# EAGLE board PCB PCB (EAGLE 9.7.0)
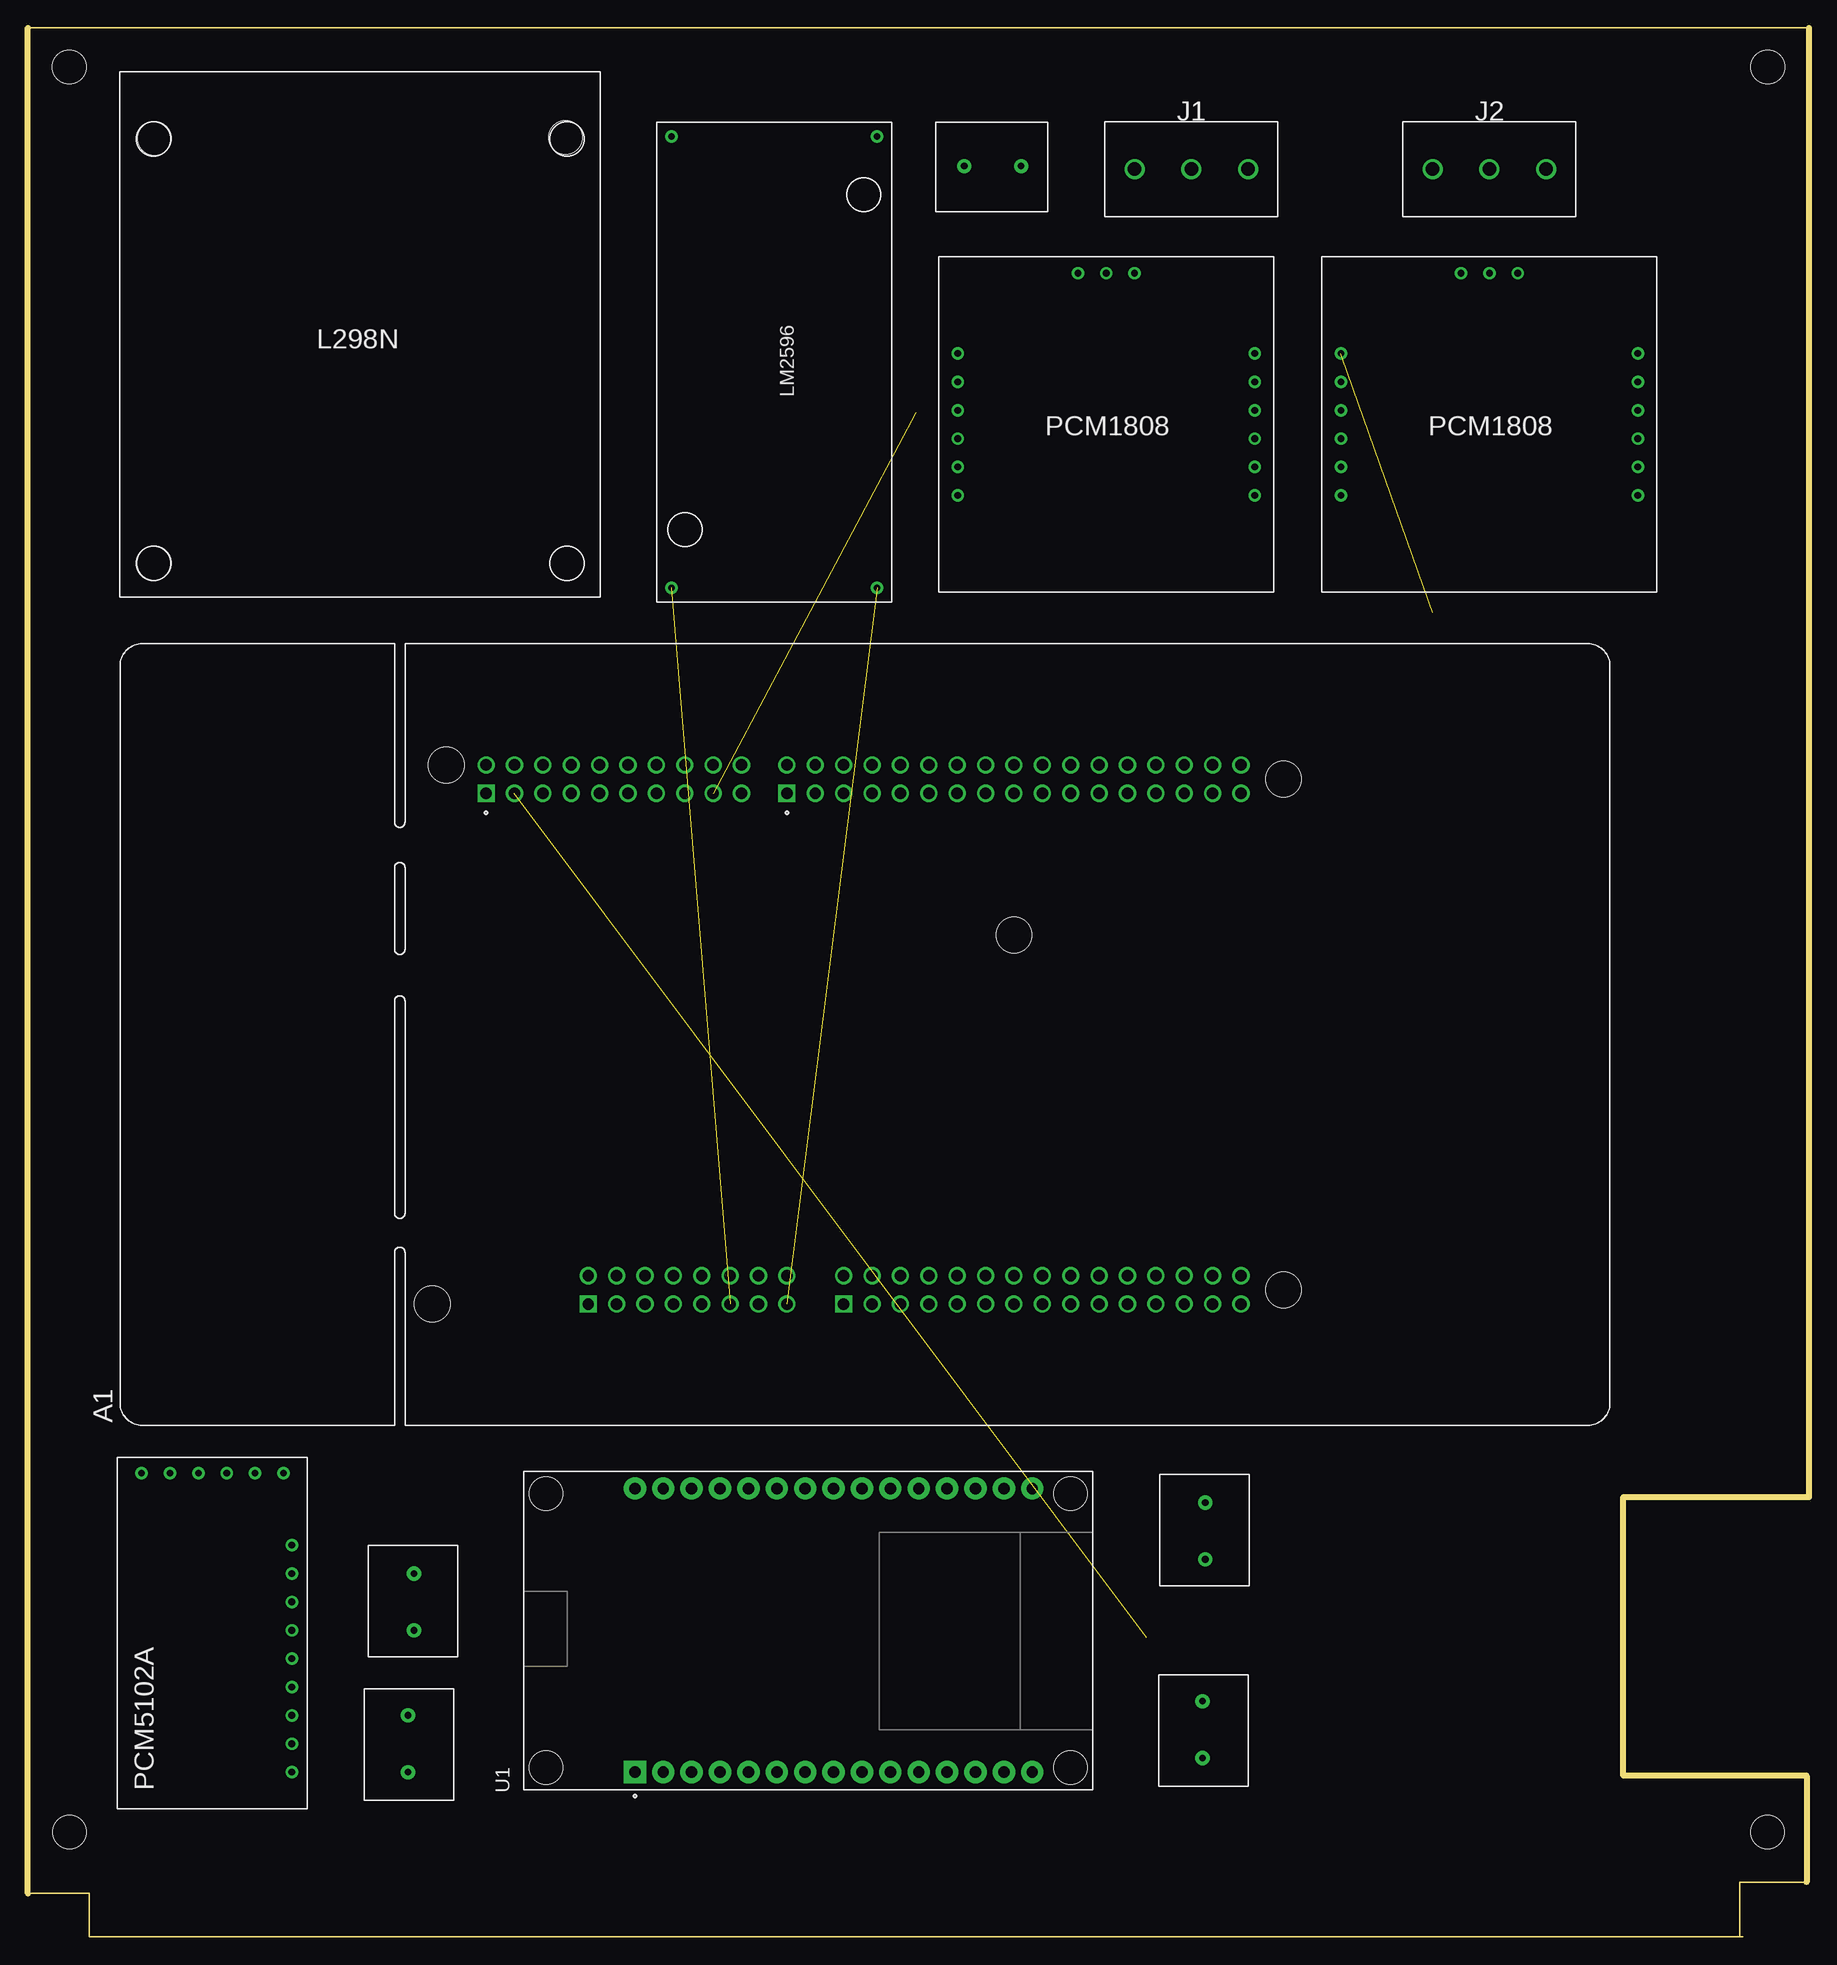
[diagram p0: board, top side]
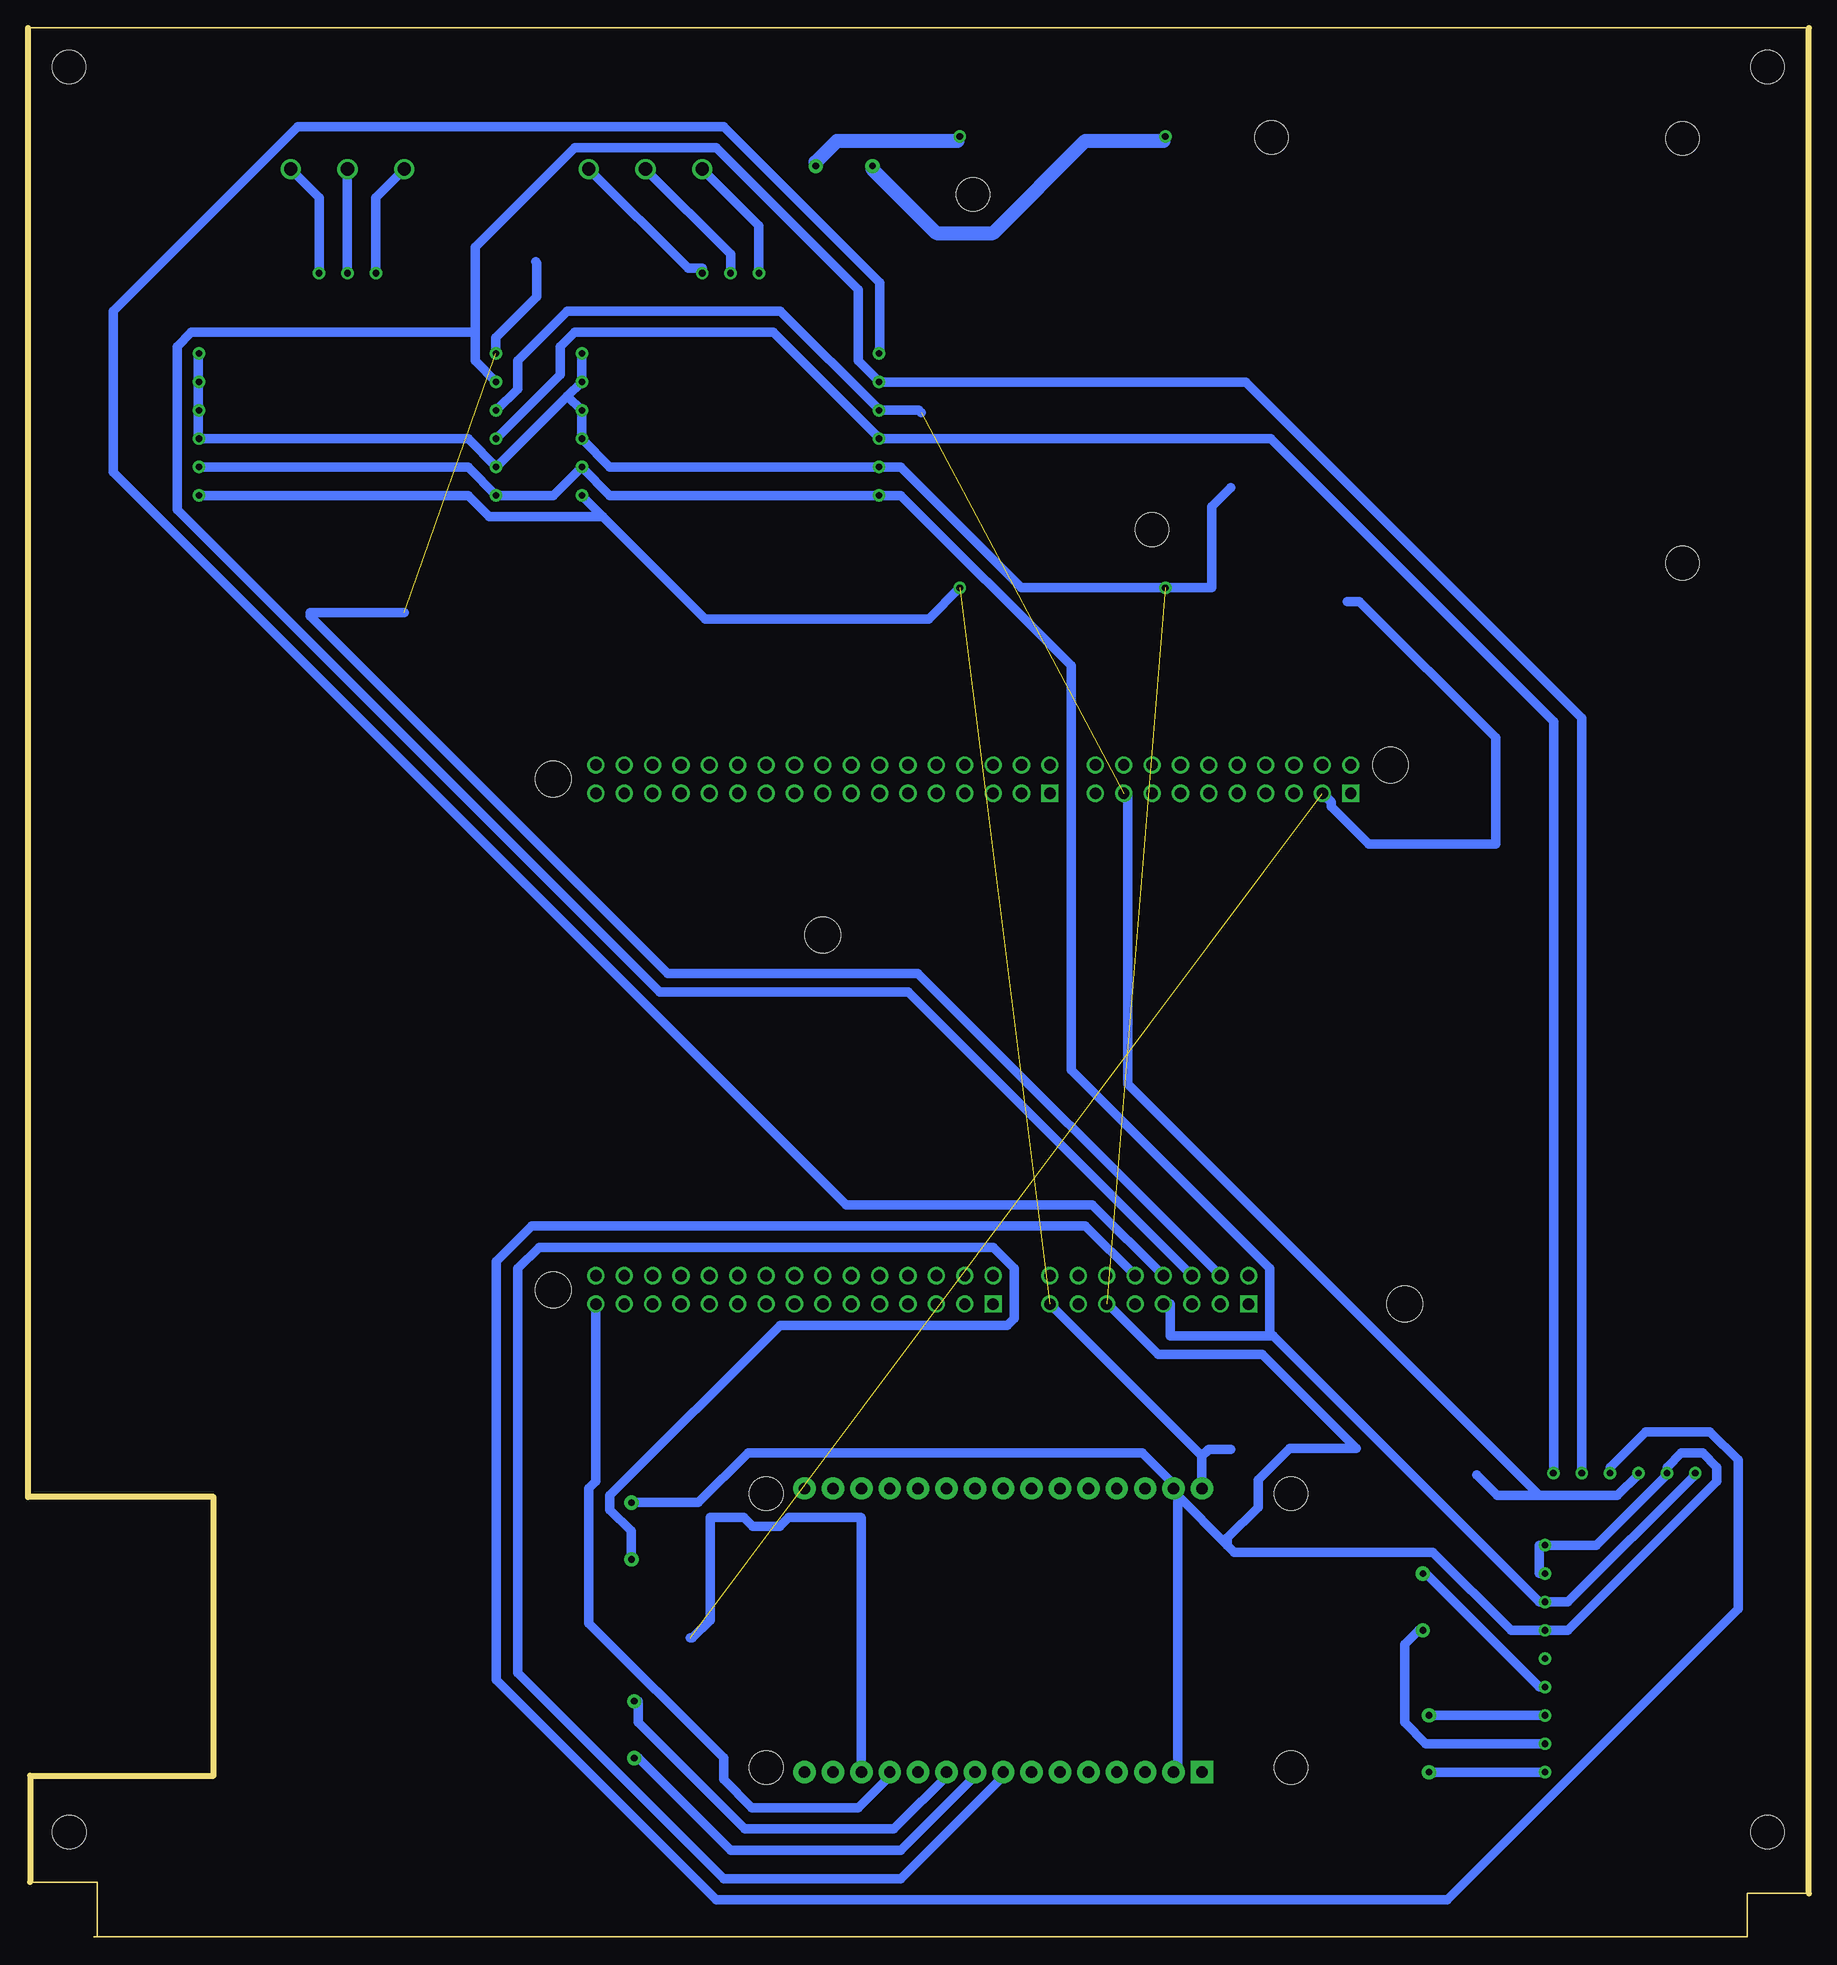
[diagram p1: board, bottom side, seen from below]

Size 159.4 x 170.9 mm. Coordinates in mm from the lower left corner, seen from the top.
Outline: 153.2,0 153.2,4.9 159.2,4.9 159.2,14.45 142.79,14.45 142.79,39.39 159.4,39.39 159.4,170.9 0,170.9 0,3.9 5.5,3.9 5.5,0 153.2,0
Outline: 153.2,0 153.5,0
Copper layers (1*16): Top / Bottom
Stack-up Default Layer Stack: Top User Defined 0.035mm / Dielectric-1 User Defined 1.5mm / Bottom User Defined 0.035mm
Design rules: minimum copper width 33mil, minimum drill size 0.35mm, copper clearance wire_polygon to wire_polygon 33mil, copper clearance wire_polygon to pad_smd 22mil, copper clearance wire_polygon to via 22mil, copper clearance pad_smd to pad_smd 22mil, copper clearance pad_smd to via 22mil, copper clearance via to via 22mil, copper clearance smd to pad (same net) 22mil, copper clearance smd to via (same net) 22mil, copper clearance smd to smd (same net) 22mil, dimension clearance 40mil, via restrict clearance 0mil, restrict clearance 0mil, drill distance 6mil, keepout clearance 0mil
Holes 3 mm at 3.7,167.4 11.32,161 48.11,161.09 11.31,122.99 58.81,125.99 74.81,155.99 3.71,9.39 155.71,9.39 155.72,167.4

## Footprints (pad centres in the part's own frame; a part is rotated, then mirrored left to right if it is on the bottom)
ST_NUCLEO-F767ZI = drill 1.02: 3.3 -24.13,17.15; 5 -24.13,14.61; A1 -24.13,-0.63; A2 -24.13,-3.17; A3 -24.13,-5.71; A4 -24.13,-8.25; A5 -24.13,-10.79; AGND 21.59,4.45; AVDD1 24.13,28.834; D65 -24.13,-33.65; D66 -24.13,-31.11; D67 -24.13,-28.57; D68 -24.13,-23.49; D69 -24.13,-20.95; D70 -24.13,-18.41; D71 -24.13,-15.87; D72 -24.13,-13.33; GND -24.13,12.07; GND1 -24.13,9.53; GND2 -24.13,-26.03; GND3 -21.59,-10.79; GND4 21.59,1.91; GND5 21.59,-13.33; GND6 21.59,-26.03; GND7 24.13,26.294; GND8 24.13,-18.41; IOREF -24.13,22.23; PA0 21.59,-28.57; PA2 21.59,-5.71; PA4 21.59,13.594; PA5 24.13,23.754; PA6 24.13,21.214; PA7 24.13,18.674; PA15 21.59,23.754; PB0 21.59,-31.11; PB1 21.59,-0.63; PB2 21.59,-10.79; PB3 21.59,16.134; PB4 21.59,11.054; PB5 21.59,18.674; PB6 21.59,-8.25; PB8 24.13,33.914; PB9 24.13,31.374; PB10 24.13,-31.11; PB11 24.13,-33.65; PB12 21.59,26.294; PB13 21.59,28.834; PB15 21.59,31.374; PC2 21.59,-3.17; PC7 21.59,21.214; PC8 -21.59,24.77; PC9 -21.59,22.23; PC10 -21.59,19.69; PC11 -21.59,17.15; PC12 -21.59,14.61; PD2 -21.59,12.07; PD3 -21.59,-8.25; PD4 -21.59,-5.71; PD5 -21.59,-3.17; PD6 -21.59,-0.63; PD7 -21.59,1.91; PD11 21.59,-20.95; PD12 21.59,-18.41; PD13 21.59,-15.87; PD14 24.13,16.134; PD15 24.13,13.594; PE0 21.59,-33.65; PE2 -21.59,-13.33; PE2_2 21.59,-23.49; PE3 -21.59,-23.49; PE4 -21.59,-15.87; PE5 -21.59,-18.41; PE6 -21.59,-20.95; PE7 24.13,-15.87; PE8 24.13,-13.33; PE9 24.13,4.45; PE10 24.13,-20.95; PE11 24.13,1.91; PE12 24.13,-23.49; PE13 24.13,-3.17; PE14 24.13,-0.63; PE14_2 24.13,-26.03; PE15 24.13,-28.57; PF7 -21.59,-28.57; PF8 -21.59,-26.03; PF9 -21.59,-31.11; PF12 24.13,11.054; PF13 24.13,6.99; PF15 24.13,-5.71; PG1 -21.59,-33.65; PG2 -21.59,9.53; PG3 -21.59,6.99; PG9 24.13,-10.79; PG14 24.13,-8.25; RESET -24.13,19.69; VIN -24.13,6.99 | drill 1.02 square: A0 -24.13,1.91; AVDD 21.59,6.99; NC -24.13,24.77; PC6 21.59,33.914 | hole 3.2: -22.86,-37.46; 22.86,-37.46; 24.13,37.47; 8.89,-13.33; -24.13,38.74
TERMBLK_508-3N = drill 1.2: 1 0,0; 2 5.08,0; 3 10.16,0
DAC = drill 0.6: A3V3 2.54,7.12; AGND 5.08,7.12; AGND1 10.16,7.12; BCK -14.073,3.834; DEMP -5.08,7.12; DIN -14.073,1.294; FLT -7.62,7.12; FMT 0,7.12; GND -14.073,-3.786; IRCK -14.073,-1.246; LROUT 12.7,7.12; ROUT 7.62,7.12; SCK -14.073,6.374; VIN -14.073,-6.326; XSMT -2.54,7.12
MODULE_ESP32_DEVKIT_V1 = drill 1.02 pad 2 square: 1 -12.7,15.515 | drill 1.02 pad 2: 2 -12.7,12.975; 3 -12.7,10.435; 4 -12.7,7.895; 5 -12.7,5.355; 6 -12.7,2.815; 7 -12.7,0.275; 8 -12.7,-2.265; 9 -12.7,-4.805; 10 -12.7,-7.345; 11 -12.7,-9.885; 12 -12.7,-12.425; 13 -12.7,-14.965; 14 -12.7,-17.505; 15 -12.7,-20.045; 16 12.7,-20.045; 17 12.7,-17.505; 18 12.7,-14.965; 19 12.7,-12.425; 20 12.7,-9.885; 21 12.7,-7.345; 22 12.7,-4.805; 23 12.7,-2.265; 24 12.7,0.275; 25 12.7,2.815; 26 12.7,5.355; 27 12.7,7.895; 28 12.7,10.435; 29 12.7,12.975; 30 12.7,15.515 | hole 3: -12.28,-23.475; 12.23,-23.475; 12.23,23.475; -12.28,23.475
ADCREVERSE = drill 0.6: 3.3 13.287,-2.54; 3.3V -13.287,-5.08; 5.0 13.287,-5.08; BCK -13.287,5.08; FMY 13.287,7.62; GND 13.287,0; GND1 -13.287,-2.54; GND2 0,14.814; LIN -2.54,14.814; LRCK -13.287,2.54; MD0 13.287,5.08; MD1 13.287,2.54; OUT -13.287,7.62; RIN 2.54,14.814; SCK -13.287,0
LM2596 = drill 0.6: IN+ -20.7,8.7; IN- -20.7,-9.7; OUT+ 19.7,8.7; OUT- 19.7,-9.7
TERMINAL = drill 0.6 pad 1.27: 1 2.54,4.08; 2 7.62,4.08

## Placement (x,y rotation side)
A1  NUCLEO-F767ZI  [ST_NUCLEO-F767ZI]  74.92,80.79 90 top
J1  TERM-BLK-3P  [TERMBLK_508-3N]  109.21,158.26 180 top
J2  TERM-BLK-3P  [TERMBLK_508-3N]  135.88,158.26 180 top
PCM2  PCM5102A  [DAC]  16.5,27.45 270 top
U1  ESP32-DEVKIT-V1  [MODULE_ESP32_DEVKIT_V1]  69.84,27.45 90 top
U$1  PCM1808REVERSE  [ADCREVERSE]  96.51,134.13 0 top
U$2  PCM1808REVERSE  [ADCREVERSE]  130.8,134.13 0 top
U$3  LM2596  [LM2596]  67.3,140.48 270 top
U$4  TERMINAL2  [TERMINAL]  109.21,13.48 90 top
U$5  TERMINAL2  [TERMINAL]  101.3,41.42 270 top
U$6  [L298N]  30.24,142.96 180 top
U$7  TERMINAL2  [TERMINAL]  38.09,12.21 90 top
U$8  TERMINAL2  [TERMINAL]  30.47,35.07 270 top
U$10  TERMINAL2  [TERMINAL]  81.27,154.45 0 top

## Library data of the parts
A1 = STMH7; AVAILABILITY: In Stock; CHECK_PRICES: https://www.snapeda.com/parts/NUCLEO-F767ZI/STMicroelectronics/view-part/?ref=eda; DESCRIPTION: STM32F767, mbed-Enabled Development Nucleo-144 STM32F7 ARM® Cortex®-M7 MCU 32-Bit Embedded Evaluation Board; MF: STMicroelectronics; MP: NUCLEO-F767ZI; PACKAGE: None; PRICE: None; SNAPEDA_LINK: https://www.snapeda.com/parts/NUCLEO-F767ZI/STMicroelectronics/view-part/?ref=snap
J1 J2 = Connector; CATEGORY: Connector; DESCRIPTION: TERM BLK 3P SIDE ENT 5.08mm PCB; MANUFACTURER: TE Connectivity; MPN: 282837-3; OPERATING_TEMPERATURE: -40°C to +105°C; PART_STATUS: Active; PITCH: 0.200" (5.08mm); ROHS_COMPLIANCE: RoHS Compliant; SERIES: Buchanan; SUBCATEGORY: Terminal Block; TYPE: Side Wire Entry
PCM2 U$1 U$2 = PCM
U1 = ESP32-DEVKIT-V1; AVAILABILITY: Not in stock; CHECK_PRICES: https://www.snapeda.com/parts/ESP32-DEVKIT-V1/Do+it/view-part/?ref=eda; DESCRIPTION: Dual core, Wi-Fi: 2.4 GHz up to 150 Mbits/s,BLE (Bluetooth Low Energy) and legacy Bluetooth, 32 bits, Up to 240 MHz; MF: Do it; MP: ESP32-DEVKIT-V1; PACKAGE: None; PRICE: None; SNAPEDA_LINK: https://www.snapeda.com/parts/ESP32-DEVKIT-V1/Do+it/view-part/?ref=snap
U$3-U$8 U$10 = REGULATOR

## Nets
3.3V: A1.3.3 PCM2.VIN PCM2.XSMT U$1.3.3 U$1.3.3V U$2.3.3 U$2.3.3V
5V: A1.VIN U1.30 U$1.5.0 U$2.5.0 U$3.OUT+
BCK: A1.PC10 PCM2.BCK U$1.BCK U$2.BCK
DIN: A1.PC12 PCM2.DIN
EN: U1.8 U$5.2
GND: A1.GND PCM2.DEMP PCM2.FLT PCM2.FMT PCM2.GND U1.2 U1.29 U$1.FMY U$1.GND U$1.GND1 U$1.MD0 U$1.MD1 U$2.FMY U$2.GND U$2.GND1 U$2.MD0 U$2.MD1 U$3.OUT- U$5.1
IN1: U1.9 U$4.1
IN2: U1.10 U$4.2
LRCK: A1.PA4 PCM2.IRCK U$1.LRCK U$2.LRCK
N$1: J1.3 U$1.LIN
N$2: J1.2 U$1.GND2
N$3: J1.1 U$1.RIN
N$4: J2.3 U$2.LIN
N$5: J2.2 U$2.GND2
N$6: J2.1 U$2.RIN
N$7: A1.D65 U1.12
N$8: A1.PB15 U1.13
N$9: PCM2.AGND U$8.1
N$10: PCM2.AGND1 U$8.2
N$11: PCM2.ROUT U$7.2
N$12: PCM2.LROUT U$7.1
N$14: U$3.IN+ U$10.2
N$15: U$3.IN- U$10.1
OUTA: A1.PC11 U$1.OUT
OUTB: A1.PC9 U$2.OUT
SCK: PCM2.SCK U$1.SCK U$2.SCK

## Tracks (layer width: path | path; a pad name or v marks a point on that pad's centre or on a via)
3.3V
  Bottom 0.838: 109.84,131.59 107.3,129.05 U$1.3.3V 81.27,129.05 66.03,113.81 66.03,77.61 48.25,59.84 48.25,54.12 47.95,53.82 | 117.47,129.05 112.38,129.05 109.84,131.59 | 109.84,131.59 U$1.3.3 | 117.47,129.05 120,131.59 U$2.3.3 144.13,131.59 | 117.47,129.05 U$2.3.3V | PCM2.VIN 10.15,41.42 21.58,29.99 PCM2.XSMT 24.12,29.99 47.95,53.82 | A1.3.3 57.14,56.66 57.14,53.82 47.95,53.82
5V  (1 unrouted)
  Bottom 0.838: U$3.OUT+ 78.78,118 98.79,118 107.94,127.14 | 107.94,127.14 109.84,129.05 U$1.5.0 | 107.94,127.14 118.1,127.14 120,129.05 U$2.5.0 144.13,129.05 | A1.VIN 54.33,43.05 | U1.30 54.33,43.05 | 54.33,43.05 53.72,43.66 51.74,43.66
BCK
  Bottom 0.838: 83.17,139.21 50.42,139.21 20.31,109.09 20.31,42.05 PCM2.BCK | 119.37,143.66 119.37,151.28 110.48,160.17 97.78,160.17 85.08,147.47 85.08,141.12 83.17,139.21 | 119.37,143.66 119.37,141.12 117.47,139.21 U$2.BCK | 83.17,139.21 U$1.BCK | 119.37,143.66 144.77,143.66 146.04,142.39 146.04,127.79 102.83,84.58 80.62,84.58 A1.PC10
DIN
  Bottom 0.838: PCM2.DIN 17.77,42.05 14.6,45.23 8.88,45.23 6.34,42.69 6.34,29.36 32.38,3.32 97.78,3.32 117.47,23 117.47,60.47 114.29,63.64 64.76,63.64 A1.PC12
EN
  Bottom 0.838: U$5.2 105.4,33.8 105.4,36.34 107.3,38.24 107.3,39.52 92.06,54.76 71.75,54.76 71.11,55.39 71.11,59.84 73.02,61.74 113.66,61.74 115.56,59.84 115.56,23.64 97.14,5.23 81.27,5.23 71.75,14.75 U1.8
GND  (1 unrouted)
  Bottom 0.838: 144.13,136.67 144.13,134.13 U$2.GND 120,134.13 117.47,131.59 | 144.13,139.21 144.13,141.75 U$2.FMY | 144.13,139.21 144.13,136.67 | 144.13,136.67 U$2.MD1 | 144.13,139.21 U$2.MD0 | 109.84,136.67 109.84,134.13 | 109.84,139.21 111.12,137.94 | 111.12,137.94 117.47,131.59 | 109.84,139.21 109.84,141.75 U$1.FMY | 109.84,139.21 U$1.MD0 | 111.12,137.94 109.84,136.67 | 109.84,136.67 U$1.MD1 | 117.47,131.59 U$2.GND1 | 109.84,134.13 107.3,131.59 U$1.GND1 81.27,131.59 70.47,120.8 57.77,120.8 U$3.OUT- 53.44,120.78 53.44,128.06 51.74,129.76 | 109.84,134.13 U$1.GND | PCM2.DEMP 24.12,32.53 24.12,35.07 PCM2.FLT 19.04,35.07 12.69,41.42 PCM2.GND 12.69,42.05 11.42,43.33 9.52,43.33 8.25,42.05 8.25,40.78 21.58,27.45 PCM2.FMT 26.66,27.45 33.64,34.44 51.42,34.44 52.06,35.07 | 56.5,39.52 57.14,40.15 U1.29 | 56.5,39.52 52.06,35.07 | U1.29 56.5,40.15 59.68,43.33 94.95,43.33 99.39,38.88 U$5.1 | 56.5,39.52 56.5,14.75 U1.2 | 56.5,39.52 U1.29 | 52.06,35.07 52.06,35.71 49.3,38.47 49.3,40.9 46.48,43.71 40.5,43.71 48.93,52.14 58.26,52.14 62.77,56.66 A1.GND
IN1
  Bottom 0.838: U$4.1 104.77,16.02 96.51,7.77 81.27,7.77 74.28,14.75 U1.9
IN2
  Bottom 0.838: U$4.2 104.77,21.1 104.77,19.2 95.24,9.67 81.91,9.67 76.83,14.75 U1.10
LRCK  (1 unrouted)
  Bottom 0.838: U$2.LRCK 117.47,136.67 115.56,138.58 115.56,141.12 111.12,145.56 92.06,145.56 83.17,136.67 U$1.LRCK 79.65,136.67 79.44,136.46 | 24.12,39.52 17.14,39.52 15.23,41.42 PCM2.IRCK | 24.12,39.52 60.95,76.34 60.95,102.38 A1.PA4 | 24.12,39.52 27.89,39.52 29.74,41.36
N$1
  Bottom 0.838: U$1.LIN 93.97,153.18 J1.3
N$2
  Bottom 0.838: U$1.GND2 96.51,150.64 J1.2
N$3
  Bottom 0.838: J1.1 100.32,149.37 99.05,149.37 U$1.RIN
N$4
  Bottom 0.838: U$2.LIN 128.26,155.72 J2.3
N$5
  Bottom 0.838: J2.2 U$2.GND2
N$6
  Bottom 0.838: U$2.RIN 133.34,155.72 J2.1
N$7
  Bottom 0.838: A1.D65 108.58,40.78 109.21,40.15 109.21,28.09 97.14,16.02 97.14,14.12 94.61,11.57 85.08,11.57 81.91,14.75 U1.12
N$8  (1 unrouted)
  Bottom 0.838: A1.PB15 42.75,101.58 42.75,101.21 39.4,97.86 28.04,97.86 28.04,107.36 40.24,119.56 41.34,119.56 | U1.13 84.8,37.52 84.84,37.56 91.28,37.56 92.1,36.75 94.53,36.75 95.35,37.56 98.34,37.56 98.34,28.36 99.94,26.76 100.14,26.76
N$9
  Bottom 0.838: PCM2.AGND 24.12,22.37 34.28,32.53 U$8.1
N$10
  Bottom 0.838: PCM2.AGND1 34.28,17.29 36.19,19.2 36.19,26.18 34.92,27.45 U$8.2
N$11
  Bottom 0.838: U$7.2 PCM2.ROUT
N$12
  Bottom 0.838: U$7.1 PCM2.LROUT
N$14
  Bottom 0.838: 76.19,160.8 U$3.IN+ | 88.89,158.9 U$10.2
  Bottom 1.27: 76.19,160.8 86.98,160.8 88.89,158.9
N$15
  Bottom 0.838: 57.77,160.8 U$3.IN- | 83.81,158.26 U$10.1
  Bottom 1.27: 57.77,160.8 64.76,160.8 73.02,152.55 78.09,152.55 83.81,158.26
OUTA
  Bottom 0.838: U$1.OUT 83.17,141.75 83.17,148.1 97.14,162.07 135.25,162.07 151.75,145.56 151.75,131.13 86.17,65.55 64.12,65.55 A1.PC11
OUTB  (1 unrouted)
  Bottom 0.838: U$2.OUT 117.51,143.19 113.84,146.86 113.84,149.86 113.94,149.96 | A1.PC9 79.75,86.26 102.14,86.26 134.14,118.26 134.14,118.56 125.74,118.56
SCK
  Bottom 0.838: 83.17,134.13 48.19,134.13 22.85,108.8 22.85,42.05 PCM2.SCK | 83.17,134.13 92.7,143.66 110.48,143.66 111.75,142.39 111.75,139.85 117.47,134.13 U$2.SCK | 83.17,134.13 U$1.SCK